# Altium PCB PCBLaser.PcbDoc
Units mil, origin at the board's own origin, x right, y up, seen from the top; angles counter-clockwise.
Board outline 1170 x 1330 mil, 3 copper layers (Top Layer, Jumper Layer, Bottom Layer); 28 components, 28 nets, 159 pads, 21 vias.
Unrouted connection lines stored in the file: 8.
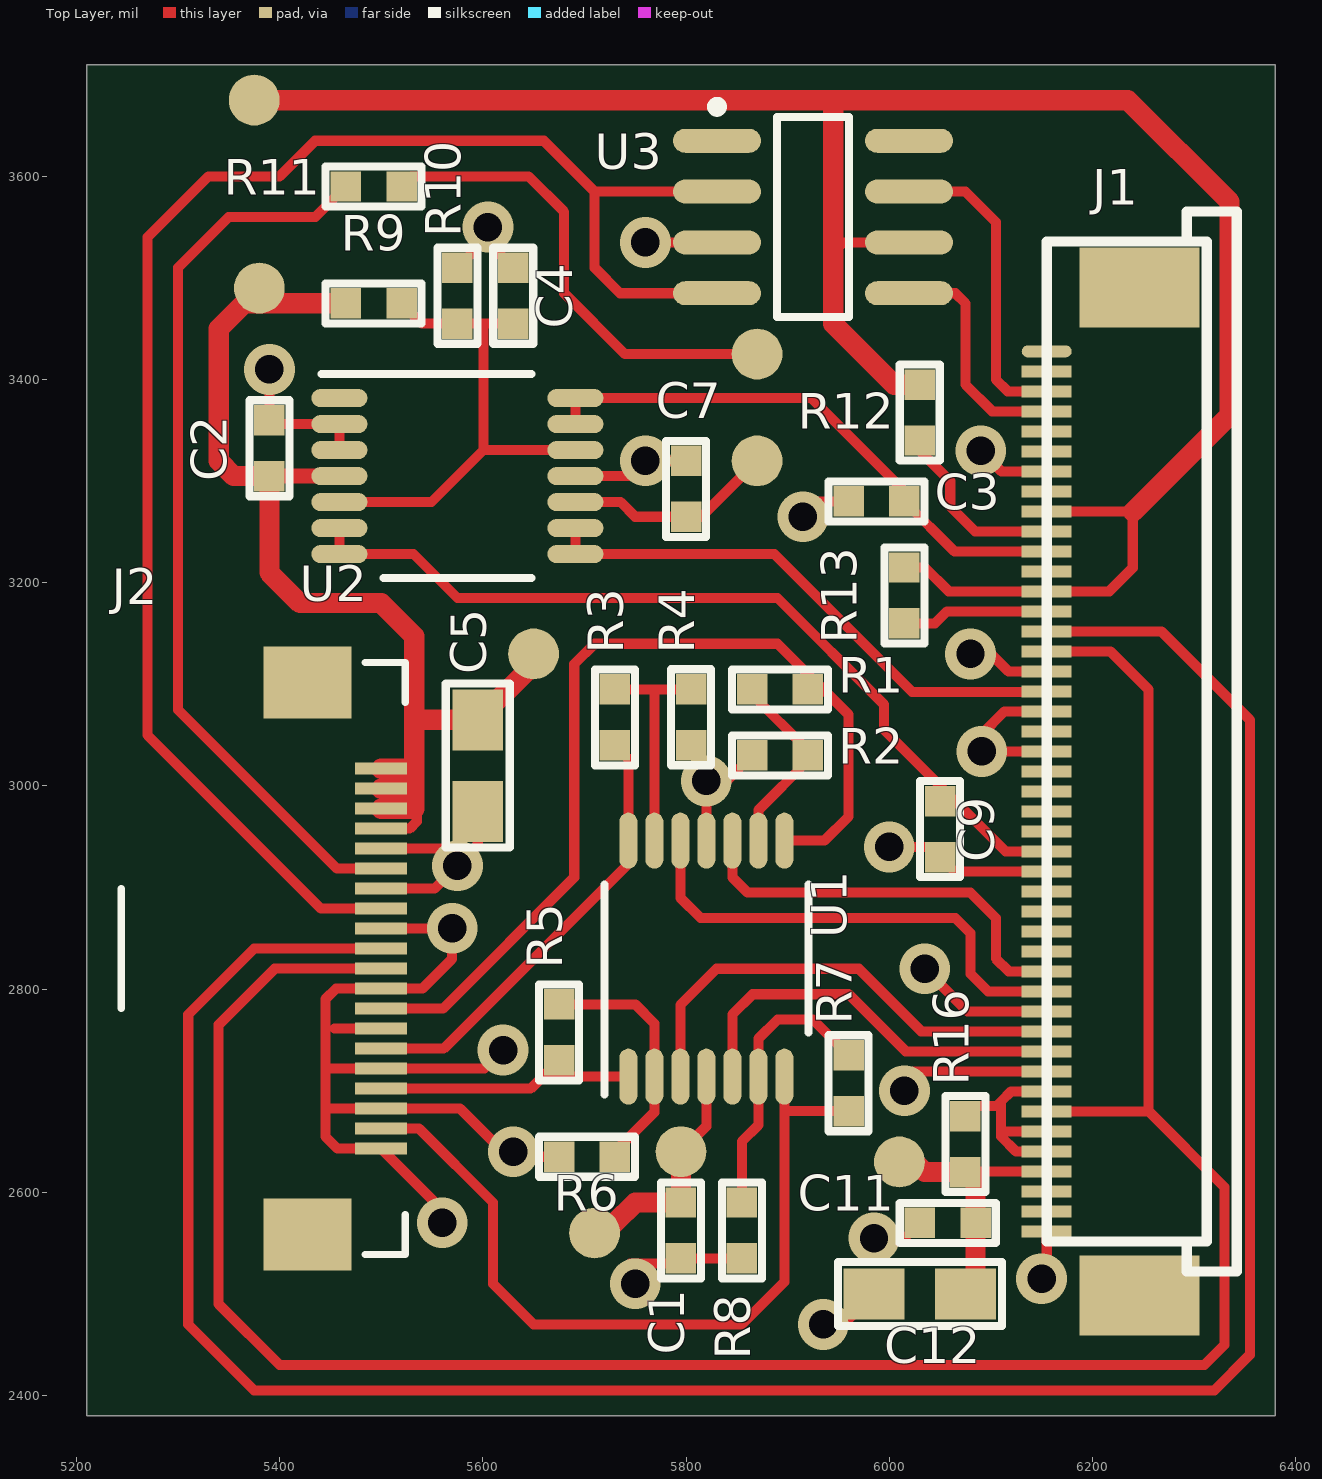
[diagram p0: Top Layer view]
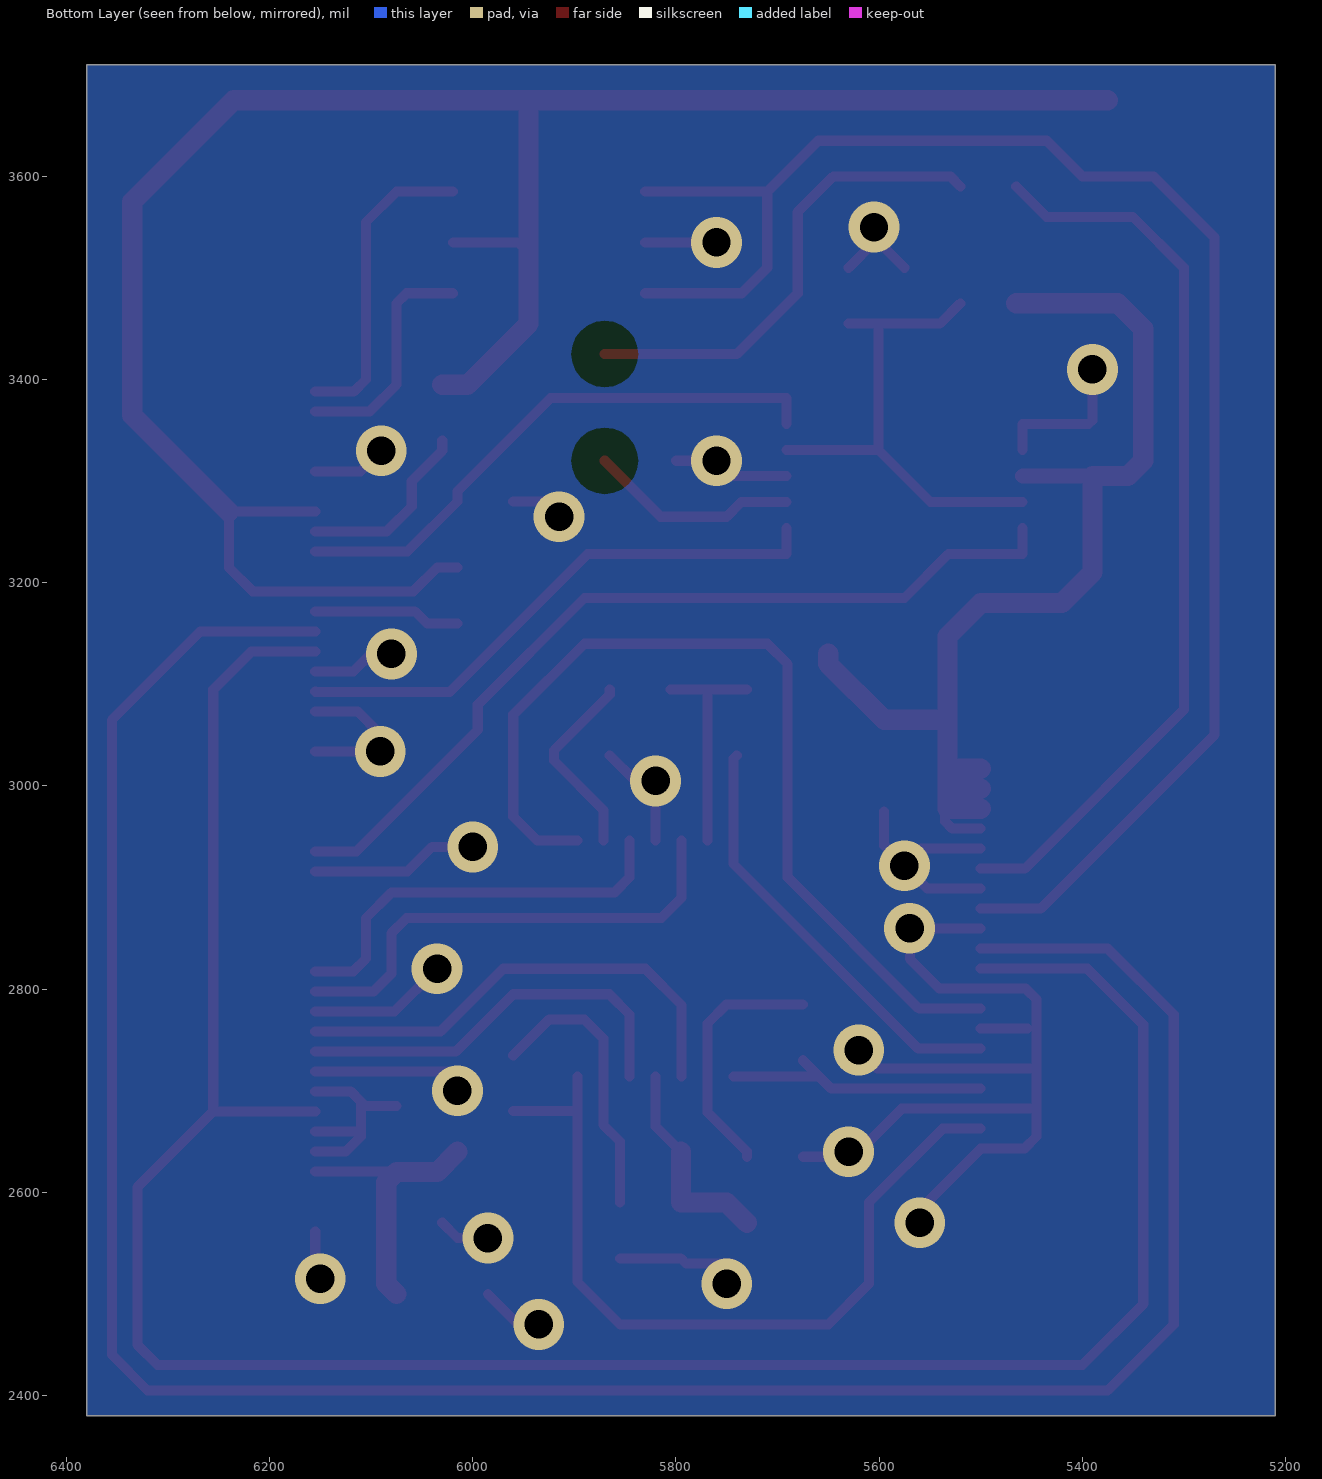
[diagram p1: Bottom Layer view, seen from below]
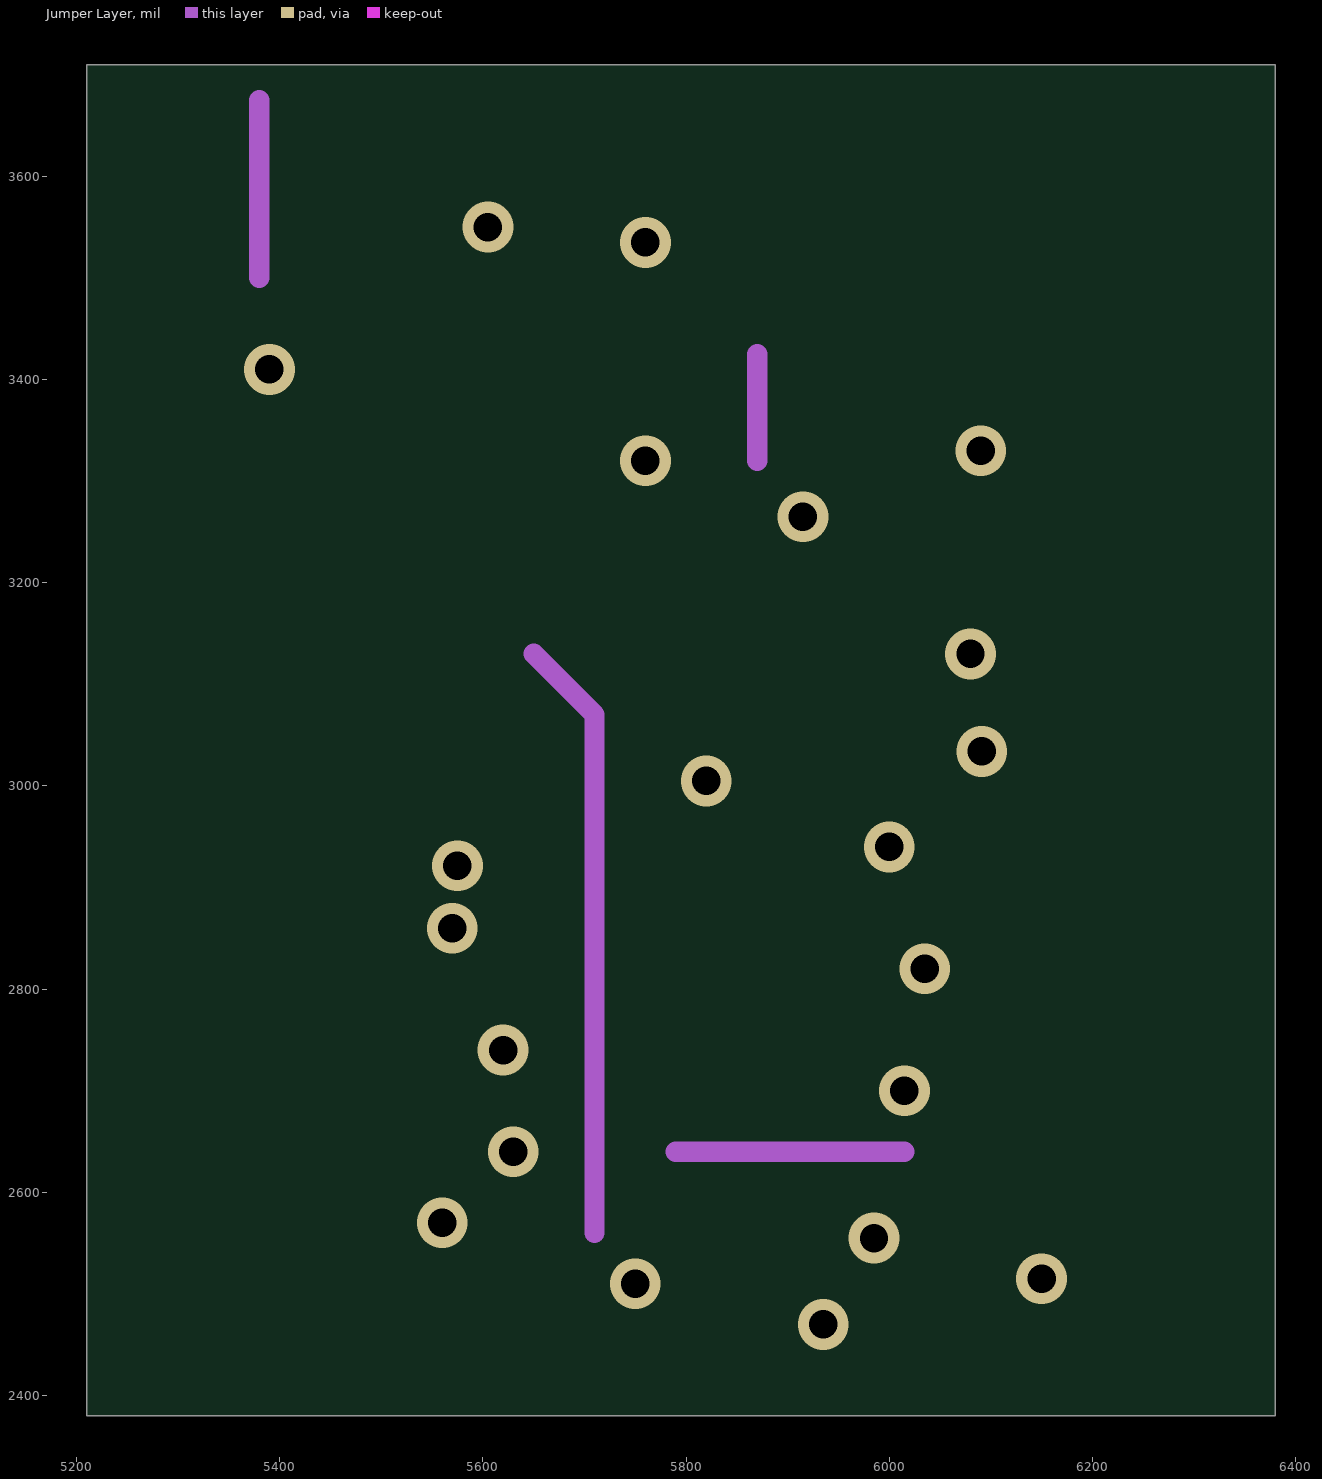
[diagram p2: Jumper Layer]

## Layer stack, top to bottom
Top Layer: signal copper 1.4
Dielectric: core 12.6, FR-4, Dk 4.8
Jumper Layer: signal copper 1.4
Dielectric: prepreg 12.6, FR-4, Dk 4.8
Bottom Layer: signal copper 1.4

## Board outline
5210,2380 6380,2380 6380,3710 5210,3710

## Design rules (kind name [scope] priority, off if disabled: settings)
Clearance [All] p1: gap=7.5
MinimumSolderMaskSliver [All] p1 off: minsoldermaskwidth=10
PlaneConnect [All] p1: planeconnectstyle=Direct reliefexpansion=20 reliefentries=4 reliefconductorwidth=10 reliefairgap=10
PolygonConnect [All] p1: connectstyle=Direct reliefconductorwidth=10 reliefentries=4 polygonreliefangle="90 Angle"
RoutingVias [All] p1: holewidth=28 width=50 viastyle="Through Hole" minholewidth=28 minwidth=50 maxholewidth=28 maxwidth=50
SilkToSilkClearance [All] p1 off: silktosilkclearance=10
SilkscreenOverComponentPads [All] p1 off: minsilkscreentomaskgap=10
SolderMaskExpansion [All] p1: expansion=4
Width [All] p1: maxlimit=200 minlimit=9 preferedwidth=10
24 further rules are at their usual default settings.

## Components (designator, comment, footprint, x,y, rotation, side; value= is the part's Value field where it differs from the comment)
C1 "0.1uF" 0603c 5795,2535 r90 top
C2 "0.1uF" 0603c 5390,3360 r270 top
C3 "0.1uF" 0603c 5960,3280 r0 top
C4 "0.1uF" 0603c 5630,3510 r270 top
C5 "10uF ceramic" 0805C 5595,2975 r90 top
C7 "0.1uF" 0603c 5800,3320 r270 top
C9 "0.1uF" 0603c 6050,2930 r90 top
C11 "0.1uF" 0603c 6030,2570 r0 top
C12 "10uF ceramic" 0805C 5985,2500 r0 top
J1 "45 pin 0.5mm" FPC-45x0.5mm 6155,2660 r90 top
J2 "046288020000846+" FPC20-0.5mm 5500,2830 r270 top
R1 "CRCW060310K0JNEA" 0603 5865,3095 r0 top
R2 "CRCW060310K0JNEA" 0603 5865,3030 r0 top
R3 "CRCW060310K0JNEA" 0603 5730,3095 r270 top
R4 "CRCW060310K0JNEA" 0603 5805,3040 r90 top
R5 "CRCW060310K0JNEA" 0603 5675,2785 r270 top
R6 "CRCW060310K0JNEA" 0603 5675,2635 r0 top
R7 "CRCW060310K0JNEA" 0603 5960,2735 r270 top
R8 "CRCW060310K0JNEA" 0603 5855,2535 r90 top
R9 "CRCW060310K0JNEA" 0603 5520,3475 r180 top
R10 "CRCW060310K0JNEA" 0603 5575,3510 r270 top
R11 "" 0603 5520,3590 r180 top
R12 "CRCW060362R0JNEA" 0603 6030,3340 r90 top
R13 "CRCW06032K20JNEA" 0603 6015,3160 r90 top
R16 "CRCW06032K20JNEA" 0603 6075,2675 r270 top
U1 "LM324KPW" PW0014A_N 5820,2830 r90 top
U2 "LM324KPW" PW0014A_N 5575,3305 r0 top
U3 "TC4425AVOA" SOIC-OA8_N 5925,3560 r0 top

## Footprints (in the part's own frame and the unit in brackets; to place one, negate y for a bottom-side part, rotate by r counter-clockwise, add the part's x,y. Pads: shape width x height; smd on the part's side, far side on the other; paste and mask are expansions set on the pad)
0603 [mil]
  rect 30x30 smd: 1(0,0) 2(55,0)
  silkscreen extent -20,-20 75,20, body extent -11,-15 66,15, height 20
0603c [mil]
  rect 30x30 smd: 1(0,0) 2(55,0)
  silkscreen extent -20,-20 75,20, body extent -11,-15 66,15, height 39
0805C [mil]
  rect 60x50 smd: 1(0,0) 2(90,0)
  silkscreen extent -35,-31 126,31, body extent -8,-24 98,24, height 39
FPC20-0.5mm [mm] "FPC20-0.5mm"
  rect 0.3x1.3 smd mask+0.05: 1(-4.75,0) 2(-4.25,0) 3(-3.75,0) 4(-3.25,0) 5(-2.75,0) 6(-2.25,0) 7(-1.75,0) 8(-1.25,0) 9(-0.75,0) 10(-0.25,0) 11(0.25,0) 12(0.75,0) 13(1.25,0) 14(1.75,0) 15(2.25,0) 16(2.75,0) 17(3.25,0) 18(3.75,0) 19(4.25,0) 20(4.75,0)
  rect 1.8x2.2 smd: M1(-6.9,-1.84) M2(6.9,-1.84)
  silkscreen extent -7.4,-6.5 7.4,0.6, body extent -7.2,-6.4 7.2,-0.4, height 2
FPC-45x0.5mm [mm] "FPC-45x0.5mm"
  oval 0.3x1.25 smd: 1(19.5,0)
  rect 0.3x1.25 smd: 2(19,0) 3(18.5,0) 4(18,0) 5(17.5,0) 6(17,0) 7(16.5,0) 8(16,0) 9(15.5,0) 10(15,0) 11(14.5,0) 12(14,0) 13(13.5,0) 14(13,0) 15(12.5,0) 16(12,0) 17(11.5,0) 18(11,0) 19(10.5,0) 20(10,0) 21(9.5,0) 22(9,0) 23(8.5,0) 24(8,0) 25(7.5,0) 26(7,0) 27(6.5,0) 28(6,0) 29(5.5,0) 30(5,0) 31(4.5,0) 32(4,0) 33(3.5,0) 34(3,0) 35(2.5,0) 36(2,0) 37(1.5,0) 38(1,0) 39(0.5,0) 40(0,0) 41(-0.5,0) 42(-1,0) 43(-1.5,0) 44(-2,0) 45(-2.5,0)
  rect 2x3 smd: 46(21.1,-2.325) 47(-4.1,-2.325)
  silkscreen extent -3.5,-4.75 23,0, body extent -5.48,-4.88 22.45,0.23, height 2
PW0014A_N [mm] "TSOP, 14-Leads, Body 5x4.4mm, Pitch 0.65mm, IPC Medium Density"
  oval 1.4x0.45 smd: 1(-2.95,1.95) 2(-2.95,1.3) 3(-2.95,0.65) 4(-2.95,0) 5(-2.95,-0.65) 6(-2.95,-1.3) 7(-2.95,-1.95) 8(2.95,-1.95) 9(2.95,-1.3) 10(2.95,-0.65) 11(2.95,0) 12(2.95,0.65) 13(2.95,1.3) 14(2.95,1.95)
  silkscreen extent -3.4,-2.55 1.85,2.55, body extent -3.21,-2.5 3.21,2.5, height 1
SOIC-OA8_N [mm] "SOIC, 8-Leads, Body 4.9x3.9mm, Pitch 1.27mm, IPC Medium Density"
  oval 2.2x0.6 smd: 1(-2.4,1.905) 2(-2.4,0.635) 3(-2.4,-0.635) 4(-2.4,-1.905) 5(2.4,-1.905) 6(2.4,-0.635) 7(2.4,0.635) 8(2.4,1.905)
  silkscreen extent -2.52,-2.5 0.9,2.88, body extent -2,-2.5 2,2.5, height 1.75

## Part data
C1 C2 C3 C4 C5 C7 C9 C11 C12: library part Cap, "Capacitor"
J1: library part CON45, "Connector"
J2: "Connector, 20 Pos. 0.5mm R/A SMT Bottom Contact One-Touch Lock, SMT"
R1 R2 R3 R4 R5 R6 R7 R8 R9 R10: "RES, 10 k, 5%, 0.1 W, 0603"
R11: library part CRCW060310K0JNEA, "RES, 47K, 1%, 0.1 W, 0603"
R12: "RES, 62, 5%, 0.1 W, 0603"
R13 R16: "RES, 2.2 k, 5%, 0.1 W, 0603"
U1 U2: "Quad Low Power Op Amp with 2KV ESD protection, PW0014A"
U3: "3A Dual High-Speed Power MOSFET Drivers, Complimentary, Extended Temperature"

## Free pads (board coordinates)
  round 50 smd: 1(5375,3675) 1(5380,3490) 1(5650,3130) 1(5710,2560) 1(5795,2640) 1(5870,3320) 1(5870,3425) 1(6010,2630)

## Via types
v1: diameter 50, hole 28, Top Layer to Bottom Layer, 21 vias

## Nets (pads, with @x,y where several pads share a name; then routed paths per layer and width w, separated by ;. In a path a pad name is that pad's centre, name@x,y a point inside that pad or via, vN(x,y) a via of type N, cw(c..) or ccw(c..) an arc to the next point about the centre after c; other vN are vias at no path point)
FOCUS1: J2.13 R1.2 U1.8 | length 933.9
  Top Layer w10: J2.13 5560.79,2780.79 5690,2910 5690,3120 5710,3140 5890,3140 5960,3070 5960,2970 5936.14,2946.14 U1.8
FOCUS2: J2.15 R3.2 U1.14 | length 426.6
  Top Layer w10: J2.15 5561.42,2741.42 5743.23,2923.23 U1.14 5743.23,3026.77 R3.2@5740,3030
FOCUS3: J2.17 R5.2 U1.1 | length 270.9
  Top Layer w10: J2.17 5647.05,2702.05 5658.86,2713.86 ; R5.2 5658.86,2713.86 ; U1.1 5658.86,2713.86
FOCUS4: J2.19 R7.2 U1.7 | length 806.1
  Top Layer w10: J2.19 5537.32,2662.68 5610,2590 5610,2510 5650,2470 5855,2470 5896.77,2511.77 5896.77,2680 ; U1.7 5896.77,2680 ; R7.2 5896.77,2680
FOCUSPWM: J2.8 U3.2 U3.4 | length 1617.2
  Top Layer w10: J2.8 5440.79,2879.21 5270,3050 5270,3540 5330,3600 5400,3600 5435,3635 5660,3635 5710,3585 ; U3.4 5735,3485 5710,3510 5710,3585 ; U3.2 5710,3585
GND: C1.1 C2.1 C3.1 C4.1 C5.1 C7.1 C9.1 C11.1 C12.1 J1.7 J1.17 J1.19 J1.21 J1.27 J1.34 J1.37 J1.45 J2.5 J2.7 J2.9 J2.12 J2.14 J2.16 J2.18 J2.20 R2.1 R4.1 R6.1 R8.1 R10.1 U1.11 U2.2 U2.3 U2.11 U3.3 | length 2871.6
  Top Layer w10: v1(5390,3410) C2.1 5393.82,3356.18 U2.2 U2.3 ; 5446.73,2721.73 J2.16 5601.73,2721.73 ; 5447.36,2682.36 J2.18 5577.64,2682.36 5620,2640 v1(5630,2640) 5635,2635 R6.1 ; 5453.9,2761.1 J2.14 ; J2.9 5569.53,2859.53 5569.53,2829.53 5540.47,2800.47 J2.12 5455.47,2800.47 5445,2790 5445,2655 5457.01,2642.99 J2.20 5560,2582.99 v1(5560,2570) ; J2.7 5552.36,2898.9 v1(5575,2921.54) ; J2.5 5558.27,2938.27 v1(5575,2921.54) ; R10.1 v1@5605,3540 ; C5.1 5595,2941.54 v1(5575,2921.54) ; v1(5605,3550) v1@5605,3540 ; C4.1 5605,3535 v1@5605,3540 ; U2.11 v1@5745,3305 ; v1(5750,2510) 5750,2525 5745,2530 5790,2530 C1.1 R8.1 ; v1(5760,3320) C7.1 ; v1(5760,3535) U3.3 ; U1.11 v1(5820,3005) 5840,3005 R2.1 ; v1(5915,3265) 5930,3280 C3.1 ; v1(5935,2470) 5955,2470 C12.1 ; v1(5985,2555) 6015,2555 C11.1 ; v1(6000,2940) 6040,2940 C9.1 6064.09,2915.91 J1.27 ; v1@6015,2695 6015,2710 6024.06,2719.05 J1.37 ; v1(6035,2820) 6076.89,2778.11 J1.34 ; v1(6080,3130) 6080.57,3130.57 6099.43,3130.57 6117.24,3112.76 J1.17 ; v1(6090,3330) 6110.39,3309.61 J1.7 ; v1(6150,2515) 6155,2520 J1.45 ; J1.21 v1(6090.98,3034.02) 6090.98,3050.98 6113.39,3073.39 J1.19
  Jumper Layer w10: v1(6080,3130) 6097.32,3130 6097.89,3130.57 v1@6090.57,3130.57
  other v1: 6015,2700 5620,2740 5570,2860
LASERCON: J1.18 U2.8 U2.9 | length 545.9
  Top Layer w10: U2.9 U2.8 5886.77,3228.23 6022.5,3092.5 6154.43,3092.5 J1.18
LASERCONPWM: J2.6 R11.2 | length 897.9
  Top Layer w10: R11.2 5435,3560 5350,3560 5300,3510 5300,3075 5456.42,2918.58 J2.6
NetC4_2: C4.2 R9.1 R10.2 U2.5 U2.12 | length 496.4
  Top Layer w10: U2.5 5549.41,3279.41 5600.59,3330.59 ; R9.1 5540,3455 R10.2 5600,3455 ; C4.2 5600,3455 ; U2.12 5600.59,3330.59 ; 5600,3455 5600.59,3454.41 5600.59,3330.59
NetC7_2: C7.2 pad.1@5870,3320 pad.1@5870,3425 R11.1 U2.10 | length 786.1
  Top Layer w10: R11.1 5530,3600 5645,3600 5680,3565 5680,3485 5740,3425 pad.1@5870,3425 ; U2.10 5735.59,3279.41 5750,3265 C7.2 5815,3265 pad.1@5870,3320
  Jumper Layer w20: 5870,3320 5870,3425
NetJ1_3: J1.3 U3.7 | length 307.8
  Top Layer w10: U3.7 6075,3585 6105,3555 6105,3400 6116.65,3388.35 J1.3
NetJ1_4: J1.4 U3.5 | length 230.6
  Top Layer w10: U3.5 6065,3485 6075,3475 6075,3395 6101.34,3368.66 J1.4
NetJ1_10: J1.10 R12.1 | length 182.6
  Top Layer w10: R12.1 6030,3330 6060,3300 6060,3275 6084.45,3250.55 J1.10
NetJ1_14: J1.14 R13.1 | length 144.9
  Top Layer w10: R13.1 6045,3160 6056.81,3171.81 J1.14
NetJ1_32: J1.32 U1.10 | length 407.3
  Top Layer w10: U1.10 5845.59,2910 5860.59,2895 6080,2895 6105,2870 6105,2830 6117.52,2817.48 J1.32
NetJ1_33: J1.33 U1.12 | length 478.4
  Top Layer w10: U1.12 5794.41,2890 5814.41,2870 6065,2870 6080,2855 6080,2815 6097.2,2797.8 J1.33
NetJ1_35: J1.35 U1.3 | length 471.4
  Top Layer w10: U1.3 5794.41,2784.41 5830,2820 5970,2820 6031.57,2758.43 J1.35
NetJ1_36: J1.36 U1.5 | length 402.1
  Top Layer w10: U1.5 5845.59,2775 5865.59,2795 5960,2795 6016.26,2738.74 J1.36
NetJ1_38: J1.38 J1.40 J1.41 R16.1 | length 211.4
  Top Layer w10: R16.1@6075,2685 6105.63,2685 6110,2689.37 ; 6115,2660 J1.40 ; J1.41 6124.69,2640.31 6110,2655 6110,2689.37 ; J1.38 6120,2699.37 6110,2689.37
NetR1_1: R1.1 R2.2 U1.9 | length 191.9
  Top Layer w10: R1.1 5865,3090 5920,3035 R2.2 5920,3025 5871.18,2976.18 U1.9
NetR3_1: R3.1 R4.2 U1.13 | length 224.4
  Top Layer w10: R3.1 5767.5,3095 ; U1.13 5768.82,3093.68 5767.5,3095 ; R4.2 5767.5,3095
NetR5_1: R5.1 R6.2 U1.2 | length 248.9
  Top Layer w10: R5.1 5750,2785 5768.82,2766.18 U1.2 5768.82,2678.82 5730,2640 R6.2
NetR7_1: R7.1 R8.2 U1.6 | length 279
  Top Layer w10: R8.2 5855,2650 5871.18,2666.18 U1.6 5871.18,2751.18 5890,2770 5925,2770 R7.1
SEL1: J1.16 J1.39 J2.11 | length 2372.9
  Top Layer w10: J2.11 5395.16,2820.16 5340,2765 5340,2490 5400,2430 6310,2430 6330,2450 6330,2605 6255.32,2679.68 ; J1.39 6255.32,2679.68 ; J1.16 6217.56,3132.44 6255.32,3094.68 6255.32,2679.68
SEL2: J1.15 J2.10 | length 2469.4
  Top Layer w10: J2.10 5374.84,2839.84 5310,2775 5310,2470 5375,2405 6320,2405 6355,2440 6355,3065 6267.87,3152.13 J1.15
V5V: C1.2 C2.2 C5.2 C11.2 C12.2 J1.9 J1.13 J1.42 J2.1 J2.2 J2.3 J2.4 pad.1@5375,3675 pad.1@5380,3490 pad.1@5650,3130 pad.1@5710,2560 pad.1@5795,2640 pad.1@6010,2630 R9.2 R12.2 R13.2 R16.2 U1.4 U2.4 U3.6 | length 4744.5
  Top Layer w10: J2.4 5527.95,2957.95 5535,2965 5535,2980 ; pad.1@5795,2640 5820,2665 U1.4 ; 5945,3525 5955,3535 U3.6 ; R13.2 6035,3215 6058.5,3191.5 J1.13 6216.5,3191.5 6239.76,3214.76 6239.76,3270.24 ; R16.2@6085,2610 6085,2620 6084.37,2620.63 J1.42 ; J1.9 6239.76,3270.24 ; 6240,3270 6239.76,3270.24
  Top Layer w15: C2.2 U2.4
  Top Layer w20: pad.1@5375,3675 5945,3675 ; R9.2 5365,3475 5340,3450 5340,3320 5355,3305 C2.2 5390,3210 5420,3180 5500,3180 5532.64,3147.36 5532.64,3067.36 ; J2.3 5532.32,2977.64 ; J2.2 5532.32,2997.32 ; J2.1 5532.64,3017.01 ; 5532.64,2977.64 5532.64,3017.01 ; pad.1@5650,3130 5650,3120 C5.2 5535,3065 5532.64,3067.36 ; pad.1@5730,2570 5750,2590 C1.2 pad.1@5795,2640 ; pad.1@6015,2640 6035,2620 R16.2 6085,2610 C11.2 6085,2510 C12.2 ; R12.2 6005,3395 5945,3455 5945,3525 5945,3675 ; 6240,3270 6335,3365 6335,3575 6235,3675 5945,3675 ; 5532.64,3017.01 5532.64,3067.36
  Jumper Layer w20: 5380,3500 5380,3675 ; 5650,3130 5710,3070 5710,2560 ; 5790,2640 6015,2640
VREF1: C9.2 J1.26 U2.6 U2.7 | length 857.6
  Top Layer w10: U2.6 U2.7 5531.77,3228.23 5575,3185 5890,3185 5995,3080 5995,3055 6114.41,2935.59 J1.26
VREF2: C3.2 J1.11 U2.13 U2.14 | length 557.8
  Top Layer w10: U2.13 U2.14 5923.23,3381.77 6015,3290 C3.2 6064.13,3230.87 J1.11
pads on no net: J1.1 J1.2 J1.5 J1.6 J1.8 J1.12 J1.20 J1.22 J1.23 J1.24 J1.25 J1.28 J1.29 J1.30 J1.31 J1.43 J1.44 J1.46 J1.47 J2.M1 J2.M2 U2.1 U3.1 U3.8

## Polygon pours and split planes (outlines as drawn)
GND on Bottom Layer "GND-bottom" (solid, pour order 2): 6380,2380 6380,3710 5850.96,3710 5210,3710 5210,3029.53 5210,2380 6380,2380